# Altium PCB Logic minimizer.PcbDoc
Units mm, origin at the board's own origin, x right, y up, seen from the top; angles counter-clockwise.
Board outline 50.25 x 50.25 mm, 2 copper layers (Top Layer, Bottom Layer), stack 0.36 mm thick; 7 components, 14 nets, 48 pads, 0 vias.
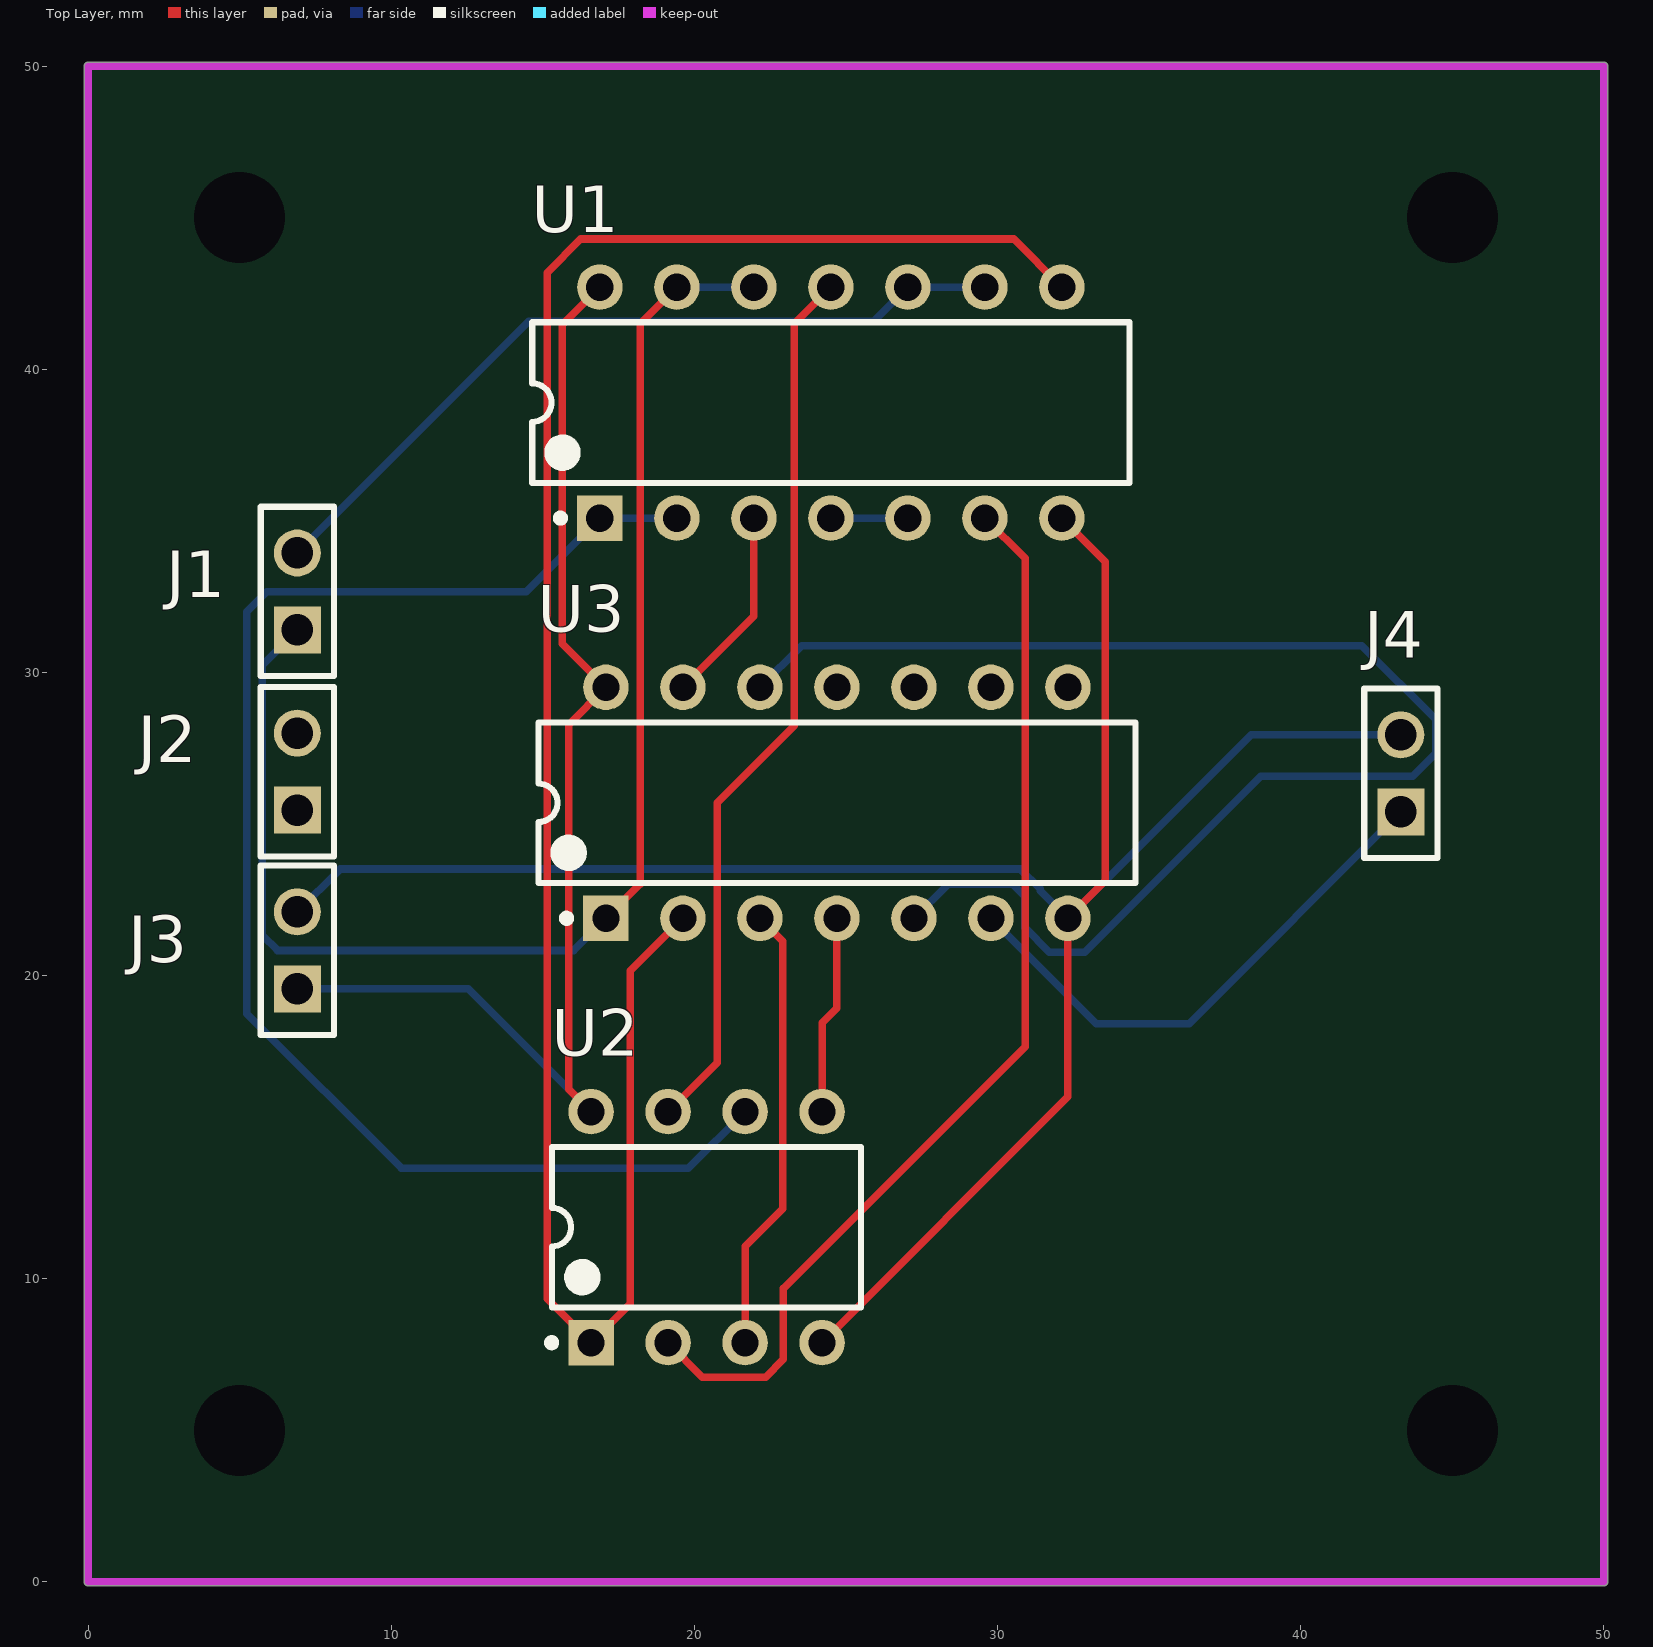
[diagram p0: Top Layer view]
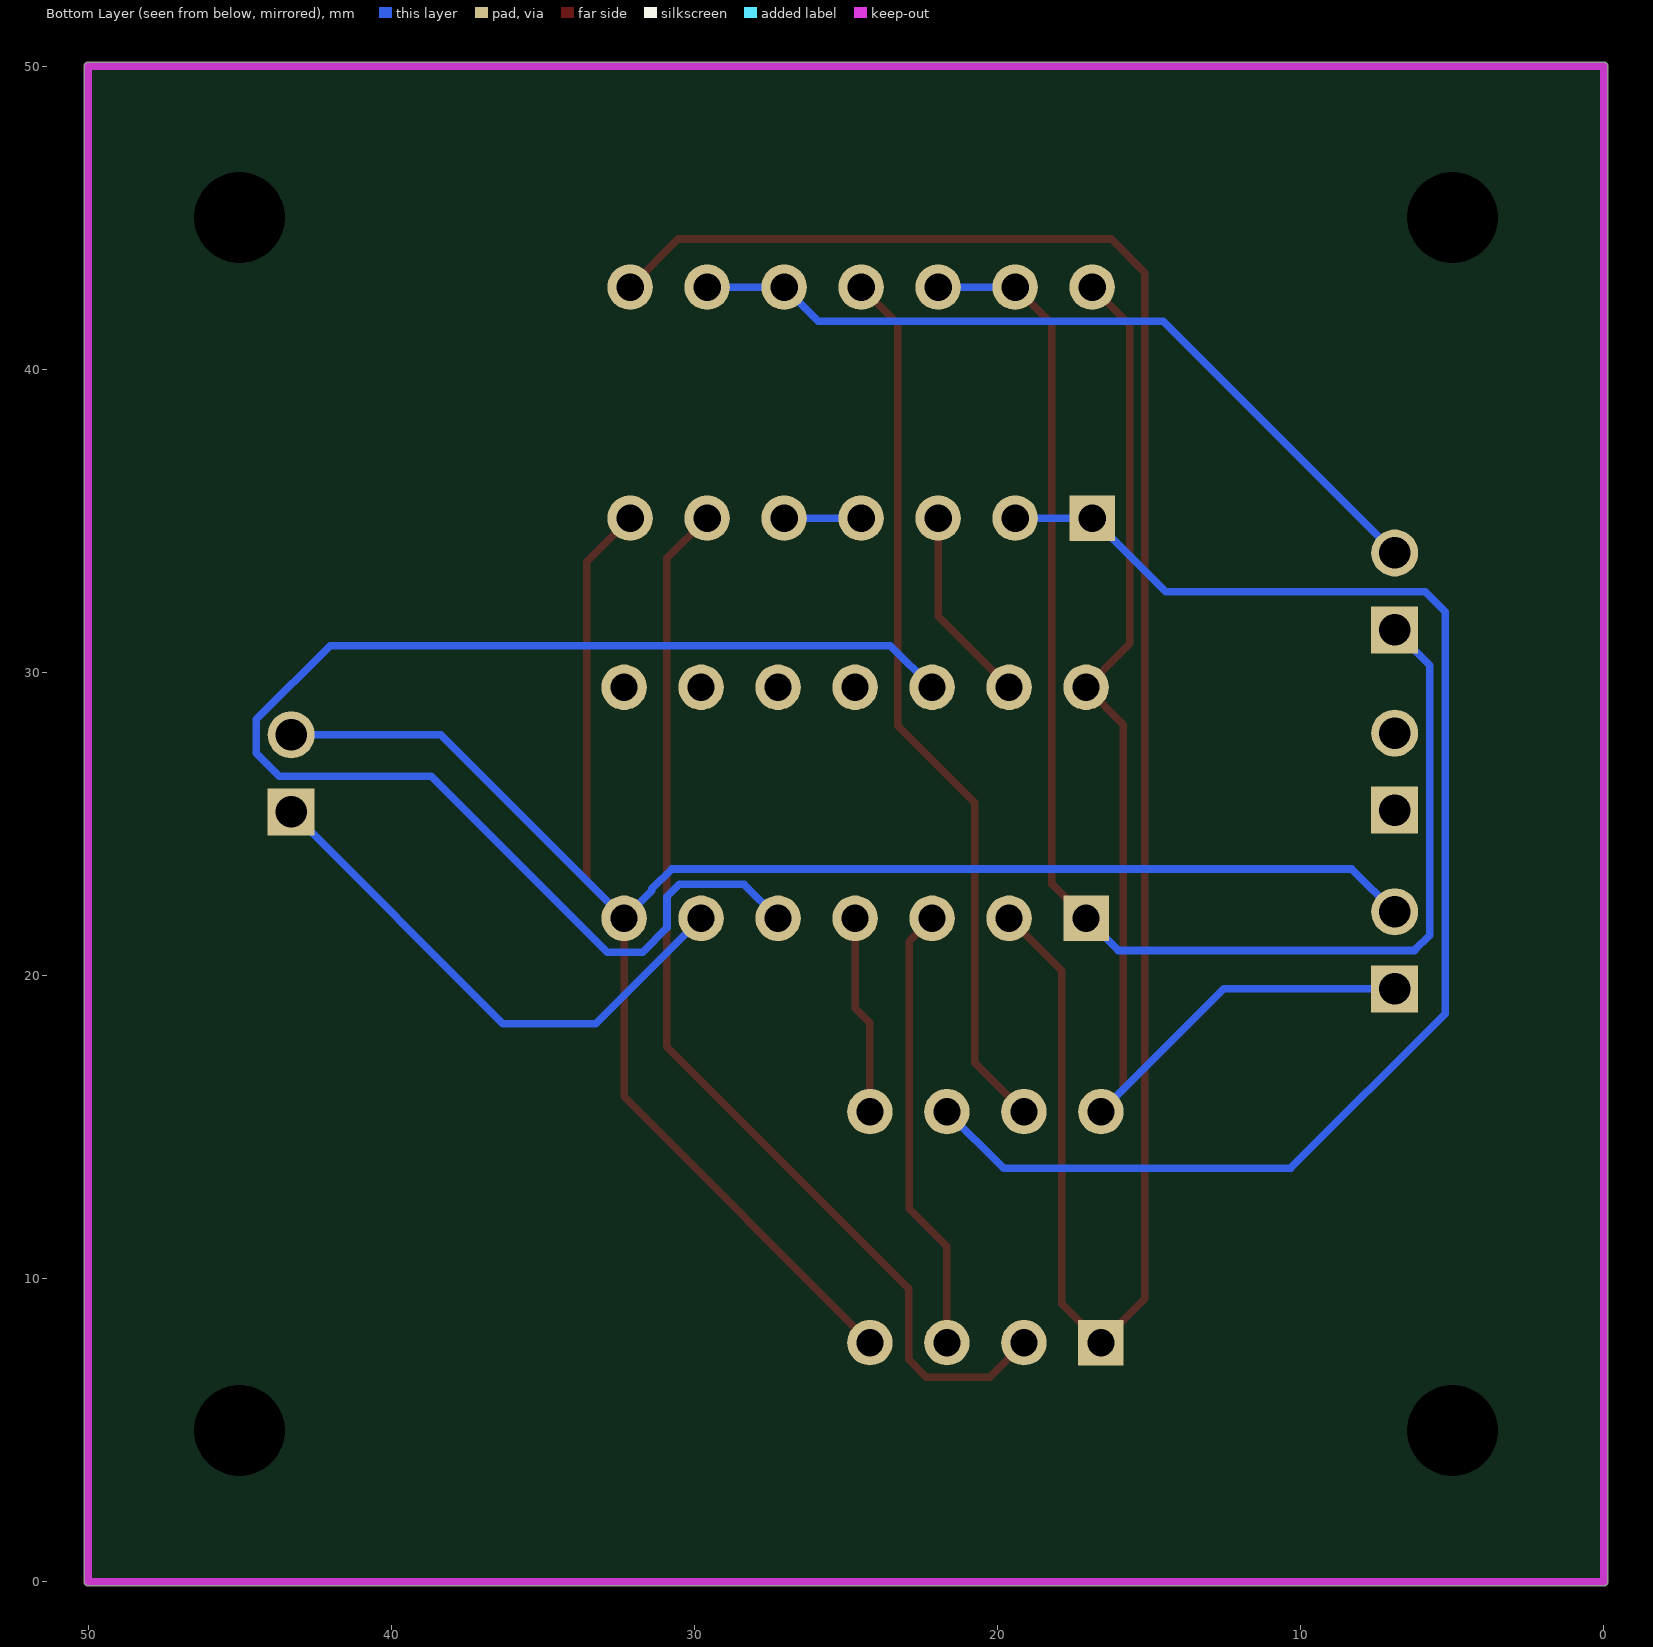
[diagram p1: Bottom Layer view, seen from below]
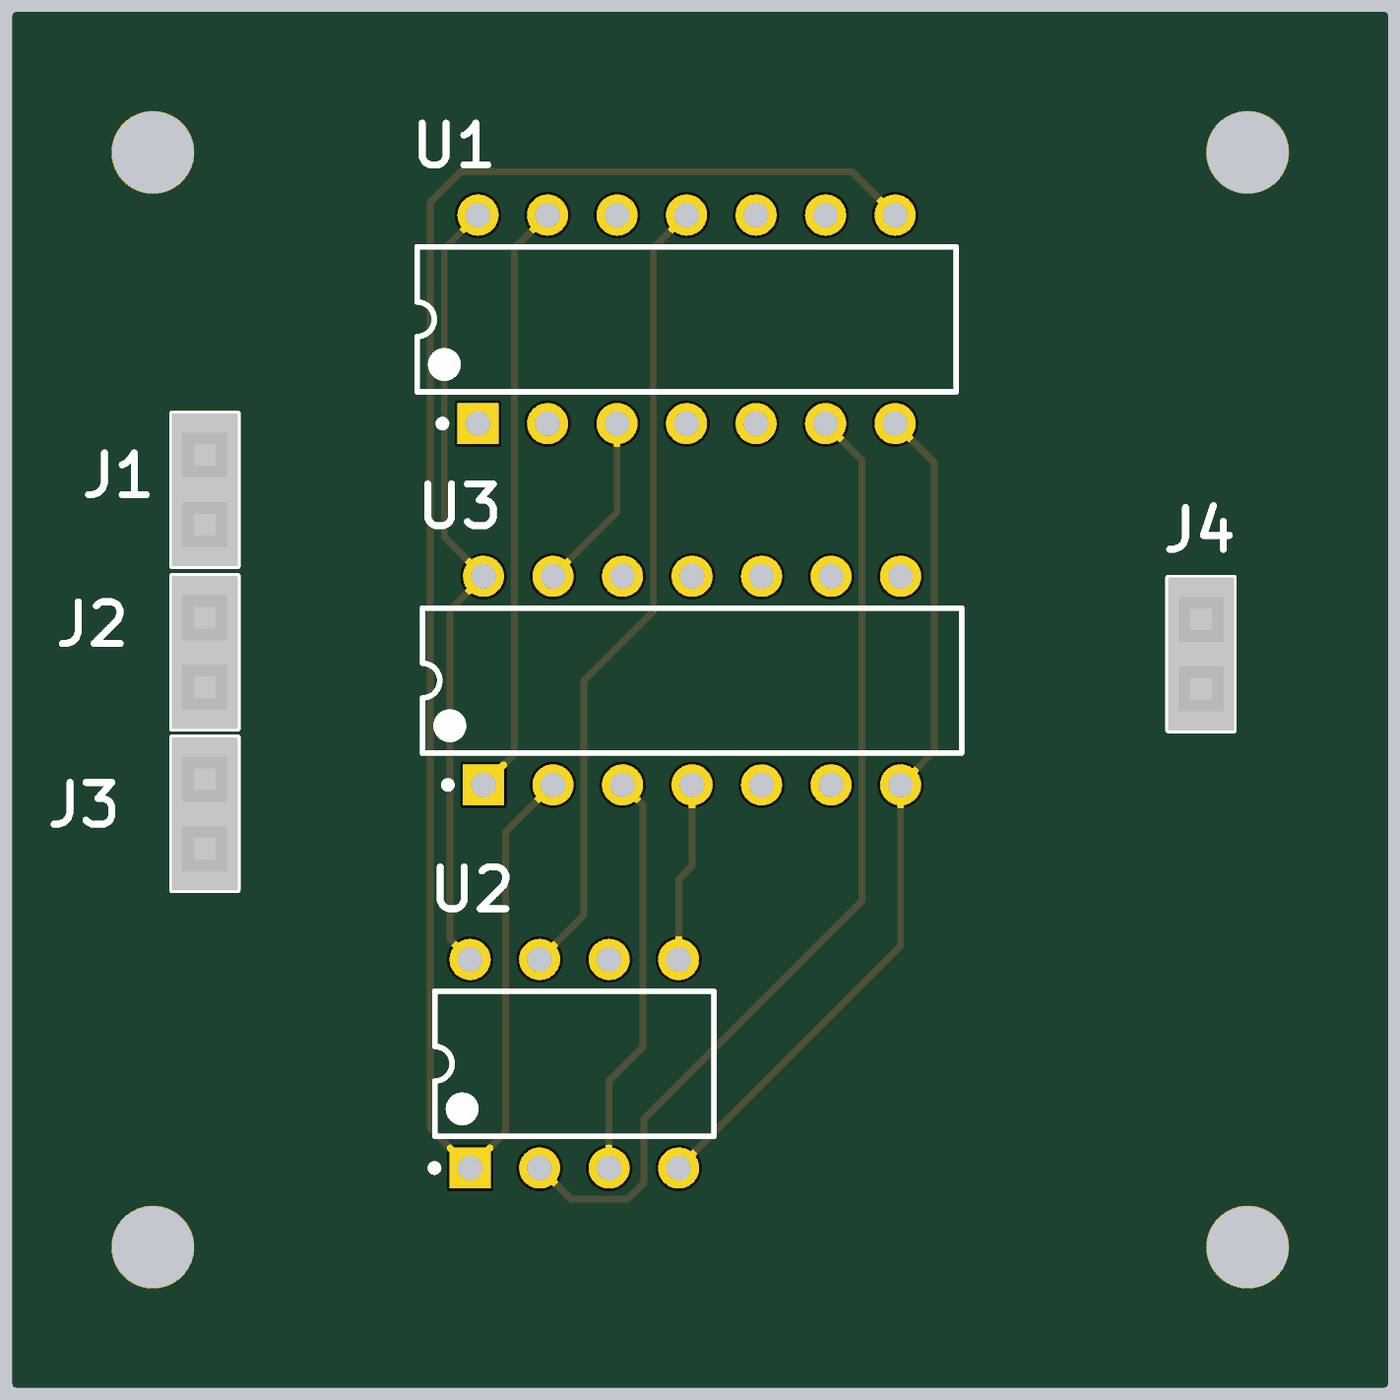
[diagram p2: 3D render of the assembled board from above, using the file's embedded part models]

## Layer stack, top to bottom
Top Solder: solder mask 0.01, Solder Resist, Dk 3.5
Top Layer: signal copper 0.03
Dielectric 1: dielectric 0.3, FR-4, Dk 4.8
Bottom Layer: signal copper 0.03
Bottom Solder: solder mask 0.01, Solder Resist, Dk 3.5

## Board outline
0,-0.127 cw(c0,0) -0.127,0 -0.127,50 cw(c0,50) 0,50.127 50,50.127 cw(c50,50) 50.127,50 50.127,0 cw(c50,0) 50,-0.127

## Design rules (kind name [scope] priority, off if disabled: settings)
Clearance [All] p1: gap=0.25 ignorepadtopadclearanceinfootprint=FALSE
PolygonConnect [All] p1: connectstyle=Relief reliefconductorwidth=0.254 reliefentries=4 polygonreliefangle="90 Angle" airgapwidth=0.254
RoutingVias [All] p1: holewidth=0.711 width=1.27 viastyle="Through Hole" minholewidth=0.711 minwidth=1.27 maxholewidth=0.711 maxwidth=1.27
SolderMaskExpansion [All] p1: expansion=0.102 istentingtop=FALSE
Width [All] p1: maxlimit=0.25 minlimit=0.25 preferedwidth=0.25
30 further rules are at their usual default settings.

## Classes and differential pairs
component class "DIP 451 Розумнюк схема КП": J1 J2 J3 J4 U2 U3

## Components (designator, comment, footprint, x,y, rotation, side; value= is the part's Value field where it differs from the comment)
J1 "SSW-102-02-T-S" SMTC-SSW-102-02-X-S 6.9,31.4 r90 top
J2 "SSW-102-02-T-S" SMTC-SSW-102-02-X-S 6.9,25.46 r90 top
J3 "SSW-102-02-T-S" SMTC-SSW-102-02-X-S 6.9,19.56 r90 top
J4 "SSW-102-02-T-S" SMTC-SSW-102-02-X-S 43.3,25.4 r90 top
U1 "SN74HC03N" N0014A 24.5,38.9 r90 top
U2 "CD40107BE" P0008A 20.4,11.7 r90 top
U3 "CD74HC10E" N0014A 24.7,25.7 r90 top

## Footprints (in the part's own frame and the unit in brackets; to place one, negate y for a bottom-side part, rotate by r counter-clockwise, add the part's x,y. Pads: shape width x height; smd on the part's side, far side on the other; paste and mask are expansions set on the pad)
N0014A [mm] "DIP, 14-Leads, Body 19.7x6.6mm, Pitch 2.54mm"
  rect 1.5x1.5 hole 0.9: 1(-3.81,7.62)
  round 1.5 hole 0.9: 2(-3.81,5.08) 3(-3.81,2.54) 4(-3.81,0) 5(-3.81,-2.54) 6(-3.81,-5.08) 7(-3.81,-7.62) 8(3.81,-7.62) 9(3.81,-5.08) 10(3.81,-2.54) 11(3.81,0) 12(3.81,2.54) 13(3.81,5.08) 14(3.81,7.62)
  silkscreen extent -3.93,-9.85 2.65,9.85, body extent -3.95,-9.85 3.95,9.85, height 5.08
P0008A [mm] "DIP, 8-Leads, Body 10.15x6.6mm, Pitch 2.54mm"
  rect 1.5x1.5 hole 0.9: 1(-3.81,3.81)
  round 1.5 hole 0.9: 2(-3.81,1.27) 3(-3.81,-1.27) 4(-3.81,-3.81) 5(3.81,-3.81) 6(3.81,-1.27) 7(3.81,1.27) 8(3.81,3.81)
  silkscreen extent -3.93,-5.1 2.65,5.23, body extent -3.95,-5.07 3.95,5.07, height 5.08
SMTC-SSW-102-02-X-S [mm] "SQ Post Socket, 1x2 Pins, Vertical, 2.54mm Pitch, Female"
  rect 1.55x1.55 hole 1.04: 1(0,0)
  round 1.55 hole 1.04: 2(2.54,0)
  silkscreen extent -1.52,-1.2 4.07,1.21, body extent -1.52,-1.21 4.06,1.21, height 8.51

## Part data
J1 J2 J3 J4: library part CMP-1023-00323-1, "SQ Post Socket, Through-hole, Vertical, -55 to 105 degC, 2.54 mm Pitch, 2-Pin, Female, RoHS", Manufacturer=Samtec, Temperature Range="-55 to 105 degC", ComponentLink1Description="Manufacturer URL", ComponentLink1URL=http://www.samtec.com, ComponentLink2Description=Datasheet, ComponentLink2URL=http://www.samtec.com/documents/webfiles/pdf/SSW_TH.PDF, ComponentLink3Description="Package Specification", ComponentLink3URL=http://www.samtec.com/documents/webfiles/cpdf/SSW-1XX-XX-XXX-X-XX-XXX-XX-MKT.pdf, DatasheetVersion=F-214, Mounting Technology=Through-hole, Orientation=Vertical, PackageDescription="Assembly, Socket Strip .016 X .031 Tail", PackageReference=SSW-102-02-X-S, PackageVersion="CA, 6/1987", PartNumber=SSW-102-02-T-S, Pitch="2.54 mm", RoHS=True
U1: library part CMP-1627-00481-2, "Quadruple 2-Input Positive-NAND Gates With Open-Drain Outputs, N0014A, TUBE", F @ Nom Voltage(Max)(Mhz)=70, Generic Part Number=SN74HC03, ICC @ Nom Voltage(Max)(mA)=0.02, Manufacturer="Texas Instruments", Operating Temperature Range(C)="-40 to 85", Rating=Catalog, tpd @ Nom Voltage(Max)(ns)=31, Voltage(Nom)(V)=5, Bits(#)=4, Code_JEDEC=MS-001, DatasheetVersion=SCLS077E, Input Type=CMOS, Output Drive (IOL/IOH)(Max)(mA)=5.2/-5.2, Output Type=CMOS, PackageReference=N0014A, Schmitt Trigger=No, Technology Family=HC, VCC(Max)(V)=6, VCC(Min)(V)=2
U2: library part CMP-1627-00567-2, "CMOS Dual 2-Input NAND Buffer/Driver, P0008A, TUBE", F @ Nom Voltage(Max)(Mhz)=8, Generic Part Number=CD40107B, ICC @ Nom Voltage(Max)(mA)=0.06, Manufacturer="Texas Instruments", Operating Temperature Range(C)="-55 to 125", Rating=Catalog, Voltage(Nom)(V)=10, Bits(#)=2, DatasheetVersion=SCHS098D, Input Type=CMOS, Output Drive (IOL/IOH)(Max)(mA)=0/-85, Output Type=CMOS, PackageReference=P0008A, Schmitt Trigger=No, Technology Family=CD4000, VCC(Max)(V)=18, VCC(Min)(V)=3
U3: library part CMP-1627-00510-2, "High Speed CMOS Logic Triple 3-Input NAND Gates, N0014A, TUBE", F @ Nom Voltage(Max)(Mhz)=70, Generic Part Number=CD74HC10, ICC @ Nom Voltage(Max)(mA)=0.02, Manufacturer="Texas Instruments", Operating Temperature Range(C)="-55 to 125", Rating=Catalog, tpd @ Nom Voltage(Max)(ns)=20, Voltage(Nom)(V)=5, Bits(#)=3, Code_JEDEC=MS-001, DatasheetVersion=SCHS128C, Input Type=CMOS, Output Drive (IOL/IOH)(Max)(mA)=5.2/-5.2, Output Type=CMOS, PackageReference=N0014A, Schmitt Trigger=No, Technology Family=HC, VCC(Max)(V)=6, VCC(Min)(V)=2

## Free pads (board coordinates)
  round 1 hole 3: 1(5,5) 2(5,45) 3(45,45) 4(45,5)

## Nets (pads, with @x,y where several pads share a name; then routed paths per layer and width w, separated by ;. In a path a pad name is that pad's centre, name@x,y a point inside that pad or via, vN(x,y) a via of type N, cw(c..) or ccw(c..) an arc to the next point about the centre after c; other vN are vias at no path point)
GND: J3.2 J4.2 U1.7 U2.4 U3.7 | length 71.9
  Top Layer w0.25: U2.4 32.32,16 U3.7 33.553,23.123 33.553,33.657 U1.7
  Bottom Layer w0.25: J3.2 8.315,23.515 30.75,23.515 31.405,22.86 31.405,22.805 U3.7 38.37,27.94 J4.2
NetJ1_1: J1.1 U1.12 U1.13 U3.1 | length 46.9
  Top Layer w0.25: U3.1 18.212,23.022 18.212,41.502 U1.13
  Bottom Layer w0.25: J1.1 5.74,30.24 5.74,21.336 6.248,20.828 16.018,20.828 U3.1 ; U1.13 U1.12
NetJ1_2: J1.2 U1.9 U1.10 | length 26.3
  Bottom Layer w0.25: J1.2 14.54,41.58 25.91,41.58 U1.10 U1.9
NetJ2_3: U1.1 U1.2 U2.6 | length 48.1
  Bottom Layer w0.25: U1.2 U1.1 14.454,32.664 5.893,32.664 5.232,32.004 5.232,18.745 10.338,13.64 19.8,13.64 U2.6
NetJ2_4: U1.4 U1.5 | length 2.5
  Bottom Layer w0.25: U1.4 U1.5
NetJ4_1: J4.1 U3.6 | length 17.9
  Bottom Layer w0.25: U3.6 33.255,18.415 36.315,18.415 J4.1
NetU1_3: U1.3 U3.13 | length 6.5
  Top Layer w0.25: U3.13 21.96,31.85 U1.3
NetU1_6: U1.6 U2.2 | length 36.1
  Top Layer w0.25: U2.2 20.264,6.756 22.352,6.756 22.936,7.341 22.936,9.677 30.912,17.653 30.912,33.758 U1.6
NetU1_8: U1.8 U2.1 U3.2 | length 69.2
  Top Layer w0.25: U3.2 17.882,20.152 17.882,9.182 U2.1 15.138,9.342 15.138,43.18 16.256,44.298 30.532,44.298 U1.8
NetU1_11: U1.11 U2.7 | length 29.4
  Top Layer w0.25: U2.7 20.752,17.132 20.752,25.705 23.292,28.245 23.292,41.502 U1.11
NetU2_3: U2.3 U3.3 | length 14.8
  Top Layer w0.25: U2.3 21.67,11.074 22.911,12.315 22.911,21.139 U3.3
NetU2_5: U2.5 U3.4 | length 6.6
  Top Layer w0.25: U2.5 24.21,18.44 24.7,18.93 U3.4
NetU3_5: U3.5 U3.12 | length 46.9
  Bottom Layer w0.25: U3.12 23.536,30.886 42.012,30.886 44.45,28.448 44.45,27.33 43.688,26.568 38.684,26.568 32.881,20.765 31.711,20.765 30.905,21.571 30.905,22.606 30.496,23.015 28.365,23.015 U3.5
VCC: J3.1 U1.14 U2.8 U3.14 | length 40.5
  Top Layer w0.25: U2.8 15.85,16.25 15.85,28.28 U3.14 15.646,30.944 15.646,41.476 U1.14
  Bottom Layer w0.25: J3.1 12.54,19.56 U2.8
pads on no net: J2.1 J2.2 U3.8 U3.9 U3.10 U3.11

## Keep-outs
Keep-Out Layer:
  lines w0.254: 20,0 0,0 ; 25,0 0,0 ; 25,50 0,50 ; 0,0 50,0 50,50 0,50 ; 0,0 0,50 ; 0,0 0,40 0,50